# EAGLE board atx_power_control (EAGLE 9.6.1)
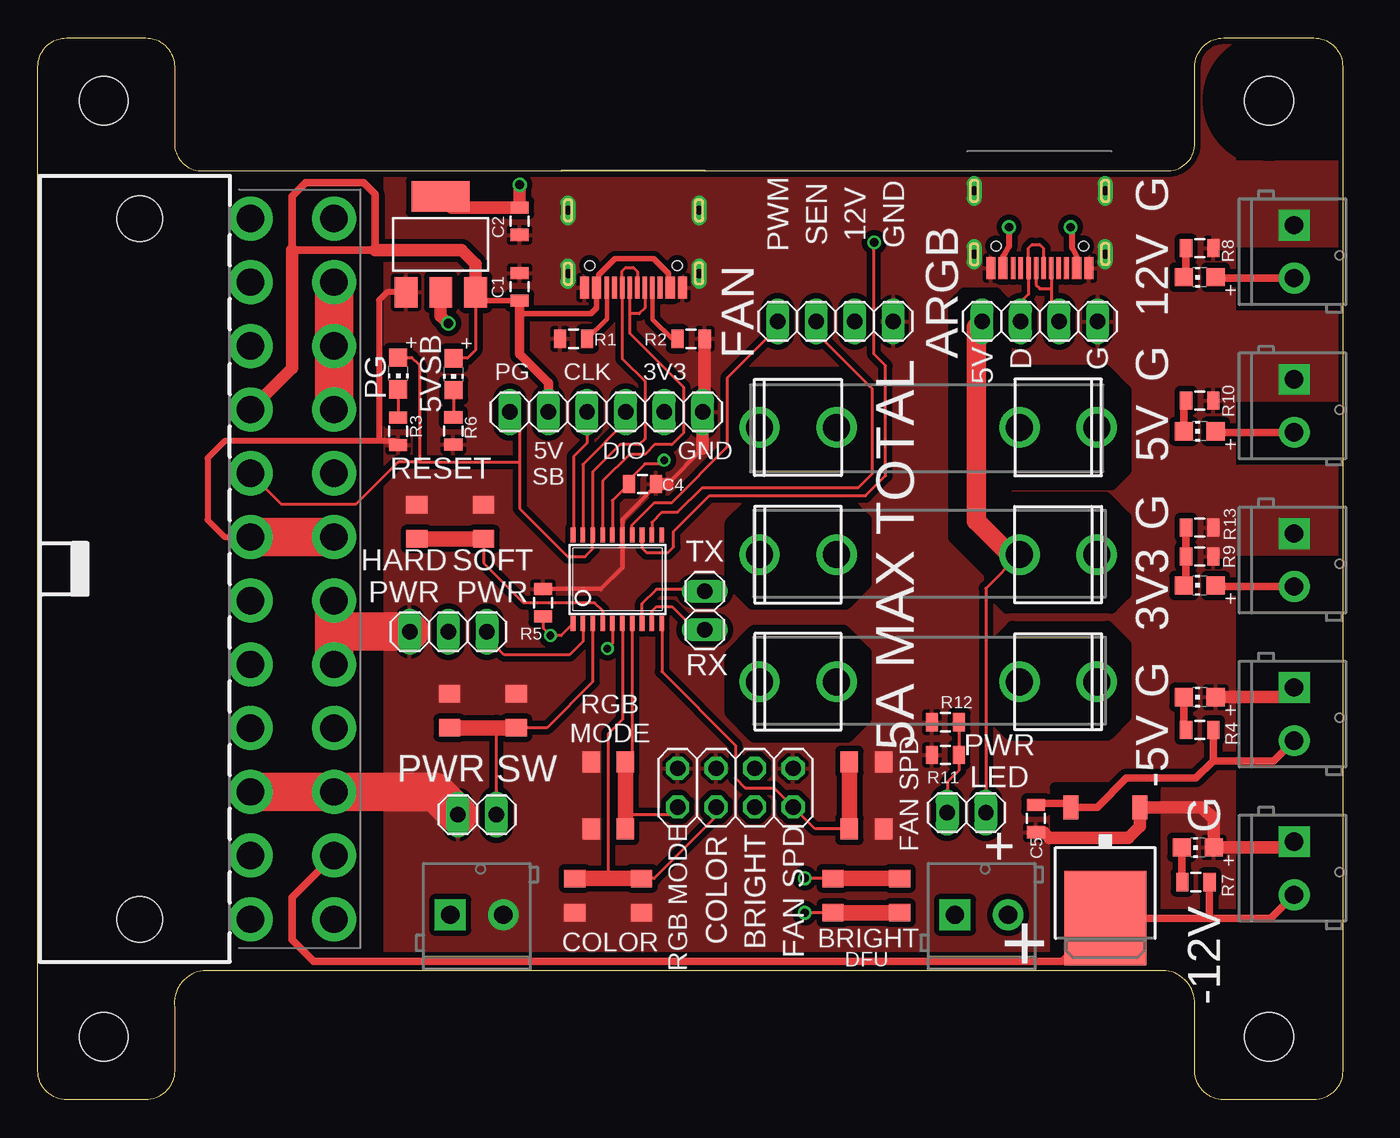
[diagram p0: board, top side]
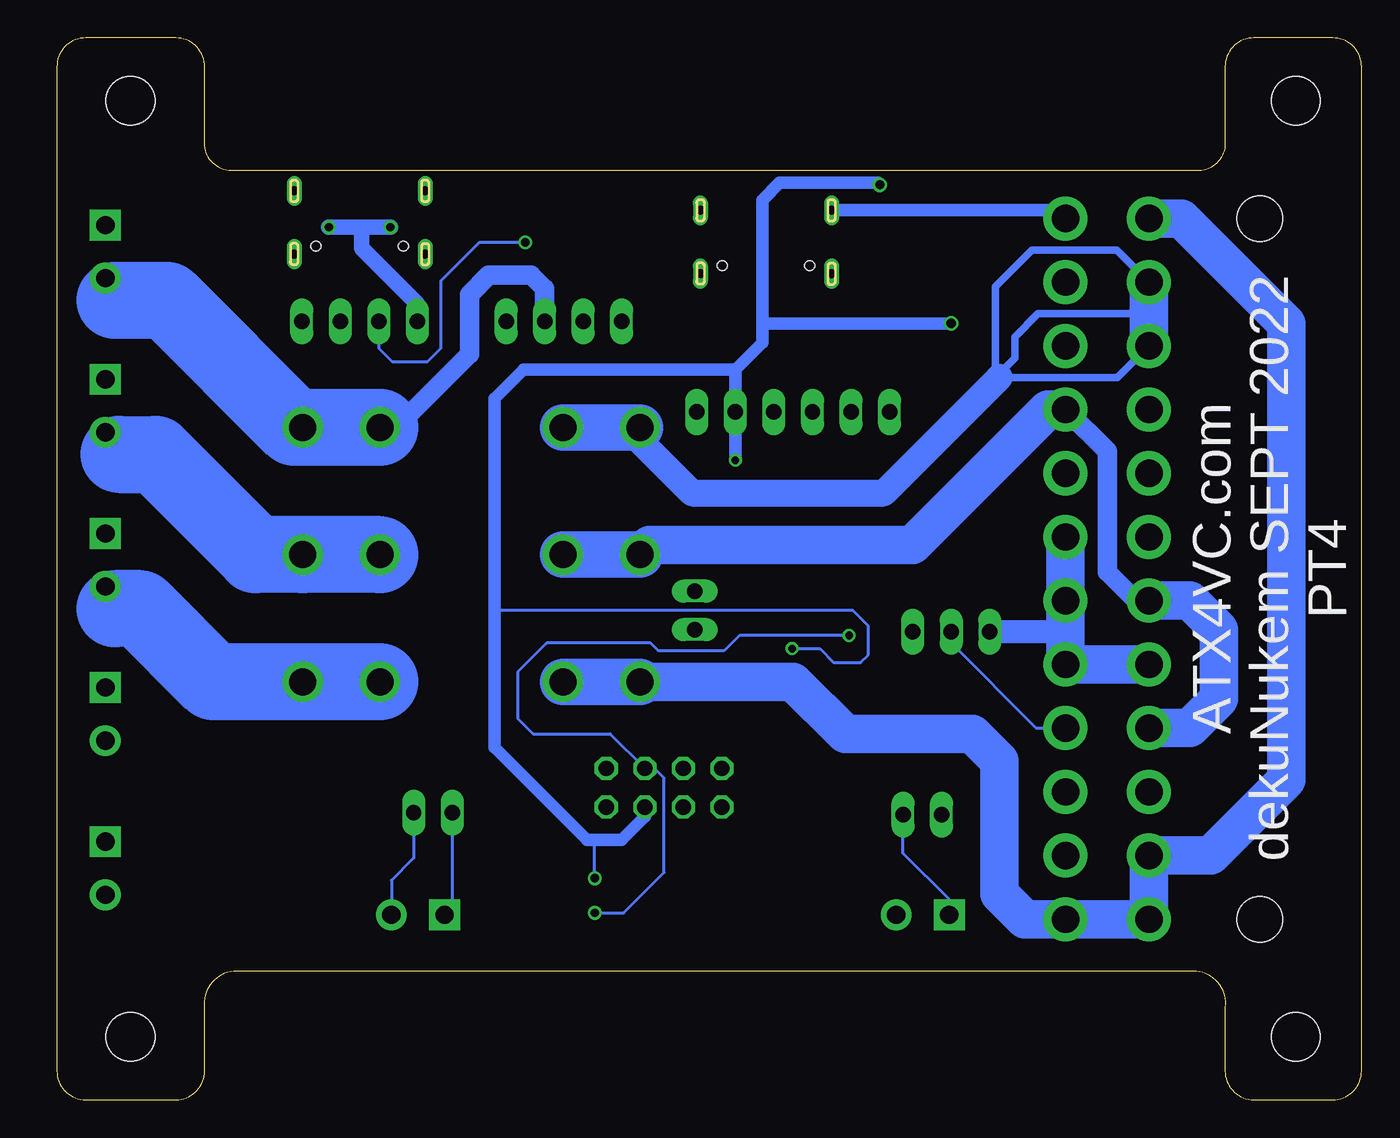
[diagram p1: board, bottom side, seen from below]

Size 86 x 70 mm. Coordinates in mm from the lower left corner, seen from the top.
Outline: 76.25,1.91 76.25,6.09 arc90 74.35,8.51 10.9,8.51 arc90 9,6.09 9,1.91 arc-90 7.09,0 1.91,0 arc-90 0,1.91 0,68.09 arc-90 1.91,70 7.09,70 arc-90 9,68.09 9,62.91 arc90 10.9,61.25 74.35,61.25 arc90 76.25,62.91 76.25,68.09 arc-90 78.16,70 84.09,70 arc-90 86,68.09 86,1.91 arc-90 84.09,0 78.16,0 arc-90 76.25,1.91
Copper layers (1*16): Top 0.035mm / dielectric 1.5mm / Bottom 0.035mm
Design rules "deku_2layer_6mil": minimum track width 6mil, minimum drill 15mil, track to track 6mil, track to pad 6mil, pad to pad 6mil, via to via 6mil, smd to smd 6mil, copper to edge 10mil, drill to drill 6mil, minimum pad ring 7mil, minimum via ring 7mil, stop-mask expansion 4mil, vias tented up to drill 25mil, thermal gap 10mil
tRestrict: area 0.3,0.2 to 8.3,8.2; area 0.3,61.8 to 8.3,69.8; area 77.2,61.9 to 85.2,69.9; area 77.2,0.2 to 85.2,8.2; area 45.7,41.1 to 54.5,47.9; area 45.7,32.8 to 54.5,39.2; area 45.7,24 to 54.5,30.9; area 62.9,24.1 to 71.6,31.1; area 62.9,32.5 to 71.6,39.6; area 62.9,40.6 to 71.6,48; area 60.5,34.3 to 66.7,53.1; area 67.1,7.7 to 73.7,20.6
bRestrict: area 0.3,0.2 to 8.3,8.2; area 77.2,0.2 to 85.2,8.2; area 0.3,61.8 to 8.3,69.8; area 77.2,61.9 to 85.2,69.9

## Footprints (pad centres in the part's own frame; a part is rotated, then mirrored left to right if it is on the bottom)
0805@1 = smd 0.8 x 1.2: 1 -0.9,0; 2 0.9,0
FUSE_5MM = drill 1.778: 1 0,-11.113; 2 0,-6.032; 3 0,6.032; 4 0,11.113
SOT223 = smd 1.499 x 2.007: 1 -2.261,-3.15; 2 0.025,-3.15; 3 2.311,-3.15 | smd 3.81 x 2.007: 4 0,3.15
TSSOP20 = smd 0.305 x 0.991: 1 -2.925,-2.918; 2 -2.275,-2.918; 3 -1.625,-2.918; 4 -0.975,-2.918; 5 -0.325,-2.918; 6 0.325,-2.918; 7 0.975,-2.918; 8 1.625,-2.918; 9 2.275,-2.918; 10 2.925,-2.918; 11 2.925,2.918; 12 2.275,2.918; 13 1.625,2.918; 14 0.975,2.918; 15 0.325,2.918; 16 -0.325,2.918; 17 -0.975,2.918; 18 -1.625,2.918; 19 -2.275,2.918; 20 -2.925,2.918
ADAFRUIT_TO252 = smd 1 x 1.6: 1 -2.28,-4.8; 2 2.28,-4.8 | smd 5.4 x 6.2: 3 0,2.5
ATX24_RIGHT_ANGLE = drill 1.8 pad 2.9: 1 23.1,4.76; 2 18.9,4.76; 3 14.7,4.76; 4 10.5,4.76; 5 6.3,4.76; 6 2.1,4.76; 7 -2.1,4.76; 8 -6.3,4.76; 9 -10.5,4.76; 10 -14.7,4.76; 11 -18.9,4.76; 12 -23.1,4.76; 13 23.1,10.26; 14 18.9,10.26; 15 14.7,10.26; 16 10.5,10.26; 17 6.3,10.26; 18 2.1,10.26; 19 -2.1,10.26; 20 -6.3,10.26; 21 -10.5,10.26; 22 -14.7,10.26; 23 -18.9,10.26; 24 -23.1,10.26 | hole 3: -23.1,-2.54; 23.1,-2.54
SCREWTERMINAL-3.5MM-2 = drill 1.2 pad 2.032 square: 1 0,0 | drill 1.2 pad 2.032: 2 3.5,0
SCREWTERMINAL-3.5MM-2-NS = drill 1.2 pad 2.032 square: 1 0,0 | drill 1.2 pad 2.032: 2 3.5,0
1X02 = drill 1.016 long: 1 -1.27,0; 2 1.27,0
1X04 = drill 1.016 long: 1 -3.81,0; 2 -1.27,0; 3 1.27,0; 4 3.81,0
1X03 = drill 1.016 long: 1 -2.54,0; 2 0,0; 3 2.54,0
2X04 = drill 1.016 octagon: 1 -3.81,-1.27; 2 -3.81,1.27; 3 -1.27,-1.27; 4 -1.27,1.27; 5 1.27,-1.27; 6 1.27,1.27; 7 3.81,-1.27; 8 3.81,1.27
CHIP-LED0805 = smd 1.2 x 1.2: A 0,-1.05; C 0,1.05
0805 = smd 0.8 x 1.2: 1 -0.9,0; 2 0.9,0
342_SWICH_FOOT = smd 1.4 x 1.15: P$1 -2.2,-1.125; P$2 -2.2,1.125; P$3 2.2,1.125; P$4 2.2,-1.125
USBC_16P_FOOT = smd 0.6 x 1.45: A1B12 -3.225,3.848; A4B9 -2.425,3.848; B4A9 2.425,3.848; B11A12 3.225,3.848 | smd 0.3 x 1.45: A5 -1.25,3.848; A6 -0.25,3.848; A7 0.25,3.848; A8 1.25,3.848; B5 1.75,3.848; B6 0.75,3.848; B7 -0.75,3.848; B8 -1.75,3.848 | drill 0.6 pad 1 long: P$13 -4.32,2.933; P$14 4.32,2.933; P$15 -4.32,-1.248; P$16 4.32,-1.248 | hole 0.65: -2.89,2.402; 2.89,2.402
M3_MOUNTING_HOLE_PACK = hole 3.2: 0,0

## Placement (x,y rotation side)
C1  1uF  [0805@1]  31.75,53.59 270 top
C2  1uF  [0805@1]  31.75,57.91 90 top
C4  1uF  [0805@1]  39.85,40.6 180 top
C5  1uF  [0805@1]  65.79,18.54 90 top
F1  FUSEX20MM  [FUSE_5MM]  58.67,35.94 270 top
F2  FUSEX20MM  [FUSE_5MM]  58.67,44.32 90 top
F3  FUSEX20MM  [FUSE_5MM]  58.67,27.56 270 top
IC2  REG1117  [SOT223]  26.53,56.39 0 top
IC3  STM32F042F4  [TSSOP20]  38.2,34.3 0 top
IC4  MY_7905DT  [ADAFRUIT_TO252]  70.36,14.48 180 top
J1  ATX24RH  [ATX24_RIGHT_ANGLE]  9.25,35 270 top
J2  [SCREWTERMINAL-3.5MM-2]  82.8,37.34 270 top
J3  [SCREWTERMINAL-3.5MM-2]  82.8,17.02 270 top
J4  [SCREWTERMINAL-3.5MM-2]  82.8,27.18 270 top
J5  [SCREWTERMINAL-3.5MM-2]  27.18,12.19 0 top
J6  [SCREWTERMINAL-3.5MM-2]  82.8,57.66 270 top
J7  [SCREWTERMINAL-3.5MM-2-NS]  82.8,47.5 270 top
J8  [SCREWTERMINAL-3.5MM-2]  60.45,12.19 0 top
JP1  [1X02]  61.21,18.92 180 top
JP2  [1X04]  52.58,51.31 0 top
JP3  [1X02]  32.38,45.34 0 top
JP5  [1X03]  27.05,30.86 180 top
JP6  [1X02]  28.96,18.8 0 top
JP7  [1X04]  66.04,51.31 0 top
JP8  [1X04]  40.01,45.34 0 top
JP9  [2X04]  45.97,20.57 180 top
JP10  [1X02]  43.94,32.26 270 top
LED1  [CHIP-LED0805]  76.58,26.54 90 top
LED2  [CHIP-LED0805]  27.4,47.83 180 top
LED3  [CHIP-LED0805]  23.75,47.88 180 top
LED4  [CHIP-LED0805]  76.45,16.64 90 top
LED5  [CHIP-LED0805]  76.58,54.23 90 top
LED6  [CHIP-LED0805]  76.58,33.91 90 top
LED7  [CHIP-LED0805]  76.58,44.07 90 top
R1  5.1K  [0805]  35.31,50.16 180 top
R2  5.1K  [0805]  43.05,50.16 0 top
R3  1K  [0805]  23.75,44.07 90 top
R4  1K  [0805]  76.58,24.38 180 top
R5  5.1K  [0805]  33.3,32.77 270 top
R6  1K  [0805]  27.38,44.09 90 top
R7  5K  [0805]  76.33,14.35 180 top
R8  5K  [0805]  76.58,56.13 180 top
R9  1K  [0805]  76.58,35.81 180 top
R10  1K  [0805]  76.58,46.1 180 top
R11  1K  [0805]  59.82,22.73 0 top
R12  1K  [0805]  59.82,24.89 0 top
R13  1K  [0805]  76.58,37.72 180 top
SW1  324_SW  [342_SWICH_FOOT]  29.34,25.65 180 top
SW2  324_SW  [342_SWICH_FOOT]  37.59,13.46 180 top
SW3  324_SW  [342_SWICH_FOOT]  27.18,38.1 180 top
SW4  324_SW  [342_SWICH_FOOT]  54.61,13.46 180 top
SW5  324_SW  [342_SWICH_FOOT]  37.59,20.07 90 top
SW7  324_SW  [342_SWICH_FOOT]  54.61,20.07 270 top
U1  USBC_16P  [USBC_16P_FOOT]  66.04,58.67 180 top
U2  USBC_16P  [USBC_16P_FOOT]  39.26,57.39 180 top
U$1  M3_MOUNTING_HOLE  [M3_MOUNTING_HOLE_PACK]  81.15,4.14 0 top
U$2  M3_MOUNTING_HOLE  [M3_MOUNTING_HOLE_PACK]  4.35,65.86 0 top
U$3  M3_MOUNTING_HOLE  [M3_MOUNTING_HOLE_PACK]  81.15,65.86 0 top
U$10  M3_MOUNTING_HOLE  [M3_MOUNTING_HOLE_PACK]  4.35,4.14 0 top

## Library data of the parts
C1 C2 C4 C5 = clock
F1-F3 IC4 = atx_power_control
IC2 = clock; MPN: REG1117; OC_FARNELL: 1097566; OC_NEWARK: 14P6981
IC3 = tx
J1 = SparkFun-Connectors
J2-J8 = atx_power_control; PROD_ID: CONN-08399
JP1-JP3 JP5-JP10 = pinhead
LED1-LED7 = adafruit
R1 R2 R5 = joyAnalog
R3 R4 R6-R13 = SparkFun-Passives
SW1-SW5 SW7 = 3pos_slide_switch_centered
U1 U2 = my_usbc_16p
U$1-U$3 U$10 = a

## Nets
+3V3: C2.2 C4.2 IC2.2 IC2.4 IC3.5 IC3.16 JP8.3 JP9.4 SW4.P$1 SW4.P$4
BUTTON1: IC3.4 SW3.P$2 SW3.P$3
BUTTON2: IC3.1 JP9.3 R5.2 SW4.P$2 SW4.P$3
GND: C1.1 C2.1 C4.1 C5.1 IC2.1 IC3.15 IC4.1 J1.3 J1.5 J1.7 J1.15 J1.17 J1.18 J1.19 J1.24 J2.1 J3.1 J4.1 J5.2 J6.1 J7.1 JP2.4 JP5.3 JP6.1 JP7.4 JP8.4 JP9.1 JP9.5 JP9.7 LED1.A LED4.A R1.2 R2.2 R3.1 R5.1 R6.1 R8.1 R9.1 R10.1 R11.1 R12.1 R13.1 SW1.P$1 SW1.P$4 SW2.P$2 SW2.P$3 SW3.P$1 SW3.P$4 SW5.P$2 SW5.P$3 SW7.P$2 SW7.P$3 U1.A1B12 U1.B11A12 U1.P$13 U1.P$14 U1.P$15 U1.P$16 U2.A1B12 U2.B11A12 U2.P$13 U2.P$14 U2.P$15 U2.P$16
N$1: LED3.C R3.2
N$2: IC4.3 J1.14 J3.2 R7.1
N$3: IC3.20 JP8.1
N$4: IC3.19 JP8.2
N$5: LED1.C R4.2
N$6: IC3.12 JP2.2
N$7: IC3.14 JP2.1
N$8: LED4.C R7.2
N$9: LED5.C R8.2
N$10: F1.1 F1.2 J1.4 J1.6 J1.21 J1.22 J1.23
N$11: C5.2 IC4.2 J4.2 R4.1
N$12: IC3.9 JP10.2
N$13: IC3.6 JP9.6 SW2.P$1 SW2.P$4
N$14: F3.1 F3.2 J1.1 J1.2 J1.12 J1.13
N$16: F2.1 F2.2 J6.2 JP2.3 LED5.A
N$17: J8.1 JP1.2 R11.2 R12.2
N$18: LED6.C R9.2 R13.2
N$19: F3.3 F3.4 J2.2 LED6.A
N$20: LED7.C R10.2
N$21: F2.3 F2.4 J1.10 J1.11
N$22: IC3.7 JP9.8 SW5.P$1 SW5.P$4
N$23: IC3.8 JP10.1
N$24: IC3.2 JP5.1
N$25: J1.16 JP5.2
N$26: IC3.3 J5.1 JP6.2 SW1.P$2 SW1.P$3
N$27: IC3.10 JP9.2 SW7.P$1 SW7.P$4
N$29: LED2.C R6.2
N$30: F1.3 F1.4 J7.2 J8.2 JP1.1 JP7.1 LED7.A U1.A4B9 U1.B4A9
N$31: R1.1 U2.B5
N$33: R2.1 U2.A5
N$35: IC3.13 JP7.2 U1.A6 U1.B6
N$36: JP7.3 U1.A7 U1.B7
PG: IC3.18 J1.8 JP3.1 LED3.A U2.A6 U2.B6
USB_DN: IC3.17 U2.A7 U2.B7
VCC: C1.2 IC2.3 J1.9 JP3.2 LED2.A U2.A4B9 U2.B4A9

## Tracks (layer width: path | path; a pad name or v marks a point on that pad's centre or on a via)
+3V3  (via drill 0.5, 0.55, 0.6)
  Top 0.203: v41.27,42.16 41.02,41.91 40.01,41.91 38.95,40.86 C4.2 37.87,39.52 IC3.16 | SW4.P$4 50.56,14.59 v50.55,14.61 | IC3.5 37.87,30.07 v37.54,29.74
  Top 0.813: IC2.4 27.26,58.81 C2.2 v31.75,60.33 | IC2.2 26.56,51.67 v27.05,51.18
  Top 1.016: SW4.P$4 SW4.P$1
  Bottom 0.203: v50.55,14.61 50.55,17.14 | v37.54,29.74 35.71,29.74 34.8,28.83 33.02,28.83 32.51,29.34 32.51,31.24 33.53,32.26 57.02,32.26 57.15,32.38
  Bottom 0.813: v31.75,60.33 31.88,60.45 38.35,60.45 39.5,59.31 39.5,51.31 | 39.5,51.31 39.5,49.91 41.27,48.13 | 41.27,48.13 JP8.3 v41.27,42.16 | v27.05,51.18 39.37,51.18 39.5,51.31 | 41.27,48.13 55.24,48.13 57.15,46.23 57.15,32.38 57.15,23.24 51.05,17.14 50.55,17.14 48.77,17.14 47.24,18.67 JP9.4
BUTTON1
  Top 0.203: IC3.4 37.22,32.25 36.7,32.77 32,32.77 29.38,35.39 SW3.P$2
  Top 1.016: SW3.P$2 SW3.P$3
BUTTON2  (via drill 0.5, 0.55)
  Top 0.203: IC3.1 34.49,30.61 v33.78,30.61 33.3,31.09 R5.2 | SW4.P$3 50.56,12.34 v50.55,12.32
  Top 1.016: SW4.P$3 SW4.P$2
  Bottom 0.203: v50.55,12.32 48.64,12.32 45.97,14.99 45.97,21.21 46.61,21.84 JP9.3 49.53,24.13 54.61,24.13 55.63,25.15 55.63,28.19 53.72,30.1 46.86,30.1 46.35,29.59 42.04,29.59 41.02,30.61 v33.78,30.61
GND
  Top 0.254: C4.1 40.75,40.5 38.52,38.27 | 43.81,42.93 41.49,40.6 | R5.1 37.1,33.67 38.52,35.09
  Top 0.305: 38.52,38.27 IC3.15 38.52,35.09
  Top 0.406: R3.1 23.48,43.43 22.48,43.43 | J1.7 12.3,37.1 11.18,38.23 11.18,42.29 12.32,43.43 22.48,43.43 | IC2.1 23,53.24 22.48,52.72 22.48,43.43
  Top 0.813: J4.1 82.17,26.54 LED1.A | J3.1 82.42,16.64 LED4.A 77.5,18.51 76.73,19.28 IC4.1 72.64,18.03 71.88,17.27 66.67,17.27 66.31,17.64 C5.1 | 41.49,40.6 C4.1 | R2.2 43.95,45.48 JP8.4 43.81,42.93
  Top 2.54: J1.7 J1.19 | J1.3 J1.15 26.18,20.3 JP6.1 | J1.18 19.51,30.61 | 19.51,30.61 J1.17 | 19.51,30.61 19.77,30.86 JP5.3
  Bottom 0.813: U2.P$16 20.05,58.64 J1.24
  Bottom 1.524: JP5.3 19.51,30.86
  Bottom 2.54: J1.5 J1.17 19.51,30.86 J1.18 J1.19
  pour Top (isolate 0.356): 22.86,0 78.89,0 78.89,70 22.86,70
  pour Top (no thermals): 78.11,51.94 88.77,51.94 88.77,46.1 78.11,46.1
  pour Top (no thermals): 77.47,61.85 88.14,61.85 88.14,56.26 77.47,56.26
  pour Top (no thermals): 77.09,41.78 87.76,41.78 87.76,35.94 77.09,35.94
N$1
  Top 0.203: LED3.C R3.2
N$2
  Top 0.508: J1.14 16.76,13.35 16.76,10.54 18.16,9.14 67.52,9.14 IC4.3 77.09,11.98 | 77.09,11.98 81.26,11.98 J3.2 | R7.1 77.23,12.12 77.09,11.98
N$3
  Top 0.203: JP8.1 36.2,43.31 35.31,42.42 35.31,37.26 IC3.20
N$4
  Top 0.203: JP8.2 38.73,44.7 35.92,41.89 IC3.19
N$5
  Top 0.508: LED1.C 75.53,24.53 R4.2
N$6
  Top 0.203: IC3.12 40.47,38.06 41.15,38.73 42.16,38.73 43.79,40.36 54.08,40.36 54.99,41.27 54.99,46.86 51.31,50.55 JP2.2
N$7
  Top 0.203: IC3.14 39.17,37.9 40.64,39.37 41.78,39.37 45.47,43.05 45.47,47.62 48.77,50.93 JP2.1
N$8
  Top 0.508: LED4.C 75.4,14.37 R7.2
N$9
  Top 0.508: R8.2 75.68,54.38 LED5.C
N$10
  Top 2.54: J1.23 J1.22 J1.21
  Bottom 1.27: J1.21 16.76,42.75 16.76,34.8 14.87,32.9 J1.6
  Bottom 2.54: J1.4 11.31,24.5 9.4,26.42 9.4,30.99 11.31,32.9 J1.6 | J1.21 20.67,45.5 29.59,36.58 46.93,36.58 F1.1
  Bottom 3.048: F1.1 F1.2
N$11
  Top 0.508: J4.2 81.48,22.35 77.48,22.35 | R4.1 77.48,22.35 | C5.2 65.88,19.53 67.82,19.53 IC4.2 69.82,19.28 71.75,21.21 76.33,21.21 77.47,22.35 77.48,22.35
N$12
  Top 0.203: IC3.9 40.47,32.22 40.77,32.51 41.78,32.51 43.31,30.99 JP10.2
N$13
  Top 0.203: IC3.6 38.52,25.06 37.59,24.13 37.59,14.59 | JP9.6 44.7,18.67 40.62,14.59 SW2.P$1
  Top 1.016: SW2.P$4 37.59,14.59 SW2.P$1
N$14
  Bottom 2.54: J1.12 11.87,58.1 4.95,51.18 4.95,21.08 9.94,16.1 J1.2 J1.1 J1.13 22.19,11.9 23.88,13.59 23.88,22.35 25.65,24.13 34.04,24.13 37.47,27.56 F3.1
  Bottom 3.048: F3.1 F3.2
N$16
  Top 0.508: J6.2 77.7,54.16 LED5.A
  Bottom 0.813: J6.2 82.8,53.34 82.17,52.7
  Bottom 1.27: JP2.3 53.85,53.47 54.74,54.36 57.53,54.36 58.8,53.09 58.8,49.15 63.63,44.32 F2.2
  Bottom 5.08: F2.2 F2.1 70.36,44.32 78.74,52.7 82.17,52.7
N$17
  Top 0.203: R12.2 R11.2 60.72,21.73 59.94,20.95 JP1.2
  Bottom 0.203: JP1.2 59.94,12.7 J8.1
N$18
  Top 0.508: LED6.C 75.68,34.06 R9.2 R13.2
N$19
  Top 0.508: J2.2 77.7,33.84 LED6.A
  Bottom 0.813: 82.17,32.38 82.17,33.2 J2.2
  Bottom 5.08: F3.3 F3.4 75.69,27.56 80.52,32.38 82.17,32.38
N$20
  Top 0.508: LED7.C 75.53,45.95 R10.2
N$21
  Bottom 0.508: J1.10 16.09,47.62 23.88,47.62 24.13,47.62 | J1.11 16.12,56.01 21.72,56.01 24.13,53.59 24.13,47.62 | 24.13,47.62 22.86,48.9 22.86,50.29 21.34,51.82 14.01,51.82
  Bottom 1.778: F2.4 47.56,43.43 44.13,40.01 31.5,40.01 23.88,47.62
  Bottom 2.54: J1.11 14.01,51.82 J1.10
  Bottom 3.048: F2.4 F2.3
N$22
  Top 0.203: IC3.7 39.17,22.72 SW5.P$4 | JP9.8 41.66,18.8 38.72,18.8
  Top 1.016: SW5.P$4 38.72,18.8 SW5.P$1
N$23
  Top 0.203: IC3.8 39.82,32.71 40.77,33.66 43.81,33.66 JP10.1
N$24
  Top 0.203: IC3.2 35.92,30.21 35.05,29.34 30.73,29.34 29.59,30.48 JP5.1
N$25
  Bottom 0.203: JP5.2 27.05,30.1 21.45,24.5 J1.16
N$26
  Top 0.203: SW1.P$2 33.55,24.53 36.57,27.55 IC3.3 | JP6.2 30.23,24.53
  Top 1.016: SW1.P$3 30.23,24.53 SW1.P$2
  Bottom 0.203: J5.1 27.18,13.21 30.23,16.26 JP6.2
N$27
  Top 0.203: SW7.P$4 51.22,17.87 JP9.2 48.51,20.57 46.61,20.57 45.97,21.21 45.97,23.37 41.12,28.22 IC3.10
  Top 1.016: SW7.P$1 SW7.P$4
N$29
  Top 0.203: LED2.C 27.4,45.01 R6.2
N$30  (via drill 0.55)
  Top 0.203: F1.3 62.48,33.72 JP1.1
  Top 0.406: v68.07,57.53 68.17,57.43 68.17,56.16 68.48,55.58 68.47,55.56 U1.A4B9 | v64.01,57.53 64.01,56.26 63.65,55.63 63.62,55.59 U1.B4A9
  Top 0.508: J7.2 77.7,44 LED7.A
  Top 1.27: JP7.1 61.85,50.93 61.85,38.16 64.07,35.94 F1.3
  Bottom 0.203: JP1.1 62.48,15.95 63.95,14.48 J8.2
  Bottom 0.813: J7.2 81.92,43.11 81.92,42.55
  Bottom 1.016: JP7.1 62.23,52.45 65.91,56.13 65.91,57.53 | 65.91,57.53 v64.01,57.53 | 65.91,57.53 v68.07,57.53
  Bottom 5.08: F1.3 F1.4 72.9,35.94 79.5,42.55 81.92,42.55
N$31
  Top 0.305: U2.B5 37.51,51.47 R1.1
N$33
  Top 0.305: U2.A5 40.51,51.44 41.78,50.16 R2.1
N$35  (via drill 0.55)
  Top 0.203: IC3.13 39.82,36.38 40.13,36.07 41.53,36.07 41.91,36.45 41.91,37.47 44.27,39.83 54.56,39.83 55.88,41.15 55.88,48.39 55.12,49.15 v55.12,56.52 | U1.A6 66.29,56.14 66.04,56.39 65.53,56.39 65.29,56.15 U1.B6 65.29,53.1 64.77,52.58 JP7.2
  Bottom 0.203: v55.12,56.52 58.17,56.52 60.71,53.98 60.71,49.53 61.59,48.64 63.88,48.64 64.77,49.53 JP7.2
N$36
  Top 0.203: U1.A7 65.79,53.72 66.04,53.47 66.79,53.47 | U1.B7 66.79,53.47 | 66.79,53.47 66.79,51.83 JP7.3
PG
  Top 0.203: U2.A6 39.51,54.6 39.24,54.86 38.73,54.86 38.51,54.64 U2.B6 38.51,48.87 40.01,47.37 40.01,43.56 39.62,43.18 38.35,43.18 36.57,41.4 IC3.18 36.57,36.32 36.07,35.81 34.92,35.81 31.75,38.99 31.75,42.04 | J1.8 16.07,39.24 20.95,39.24 23.75,42.04 25.15,42.04 | JP3.1 31.75,44.7 31.75,42.04 | LED3.A 24.64,48.93 25.15,48.42 25.15,42.04 | 25.15,42.04 31.75,42.04
USB_DN
  Top 0.203: U2.B7 40.01,52.2 39.62,51.82 39.01,51.82 U2.A7 39.01,50.53 42.55,46.99 42.55,43.94 41.78,43.18 40.64,43.18 40.01,42.55 38.99,42.55 37.22,40.78 IC3.17
VCC
  Top 0.203: IC2.3 28.84,49.42 28.31,48.88 LED2.A
  Top 0.356: U2.A4B9 41.58,53.65 41.58,54.46 40.59,55.45 38.05,55.45 36.96,54.36 36.96,53.67 U2.B4A9 36.83,52.2 36.45,51.82 31.88,51.82 31.75,51.94 | C1.2 29.39,52.69 IC2.3
  Top 0.508: 16.76,55.88 16.76,59.56 17.65,60.45 21.46,60.45 22.23,59.69 22.23,56.01 16.76,56.01
  Top 0.61: JP3.2 33.66,47.24 31.75,49.15 31.75,51.94 C1.2
  Top 0.813: J1.9 16.76,48.25 16.76,55.88 16.76,56.01 | 22.23,56.01 27.94,56.01 28.84,55.1 IC2.3

## Text on the board
tNames: G | PWM | SEN | 12V | GND | 12V | ARGB | FAN | D | G | G | PG | 5VSB | PG | CLK | 3V3 | 5V | 5V | DIO | GND | RESET | 5V / SB | G | TX | 5A MAX TOTAL | HARD / PWR | SOFT / PWR | 3V3 | RX | G | RGB / MODE | -5V | PWR SW | PWR / LED | FAN SPD | G | + | COLOR | BRIGHT | FAN SPD | RGB MODE | BRIGHT | COLOR | + | -12V | DFU
bNames: ATX4VC.com / dekuNukem SEPT 2022 / PT4